# Altium PCB Spartan3_TestBoard.PcbDoc
Units mil, origin at the board's own origin, x right, y up, seen from the top; angles counter-clockwise.
Board outline 1950 x 1950 mil, 2 copper layers (Top Layer, Bottom Layer); 78 components, 51 nets, 480 pads, 69 vias.
Unrouted connection lines stored in the file: 33.
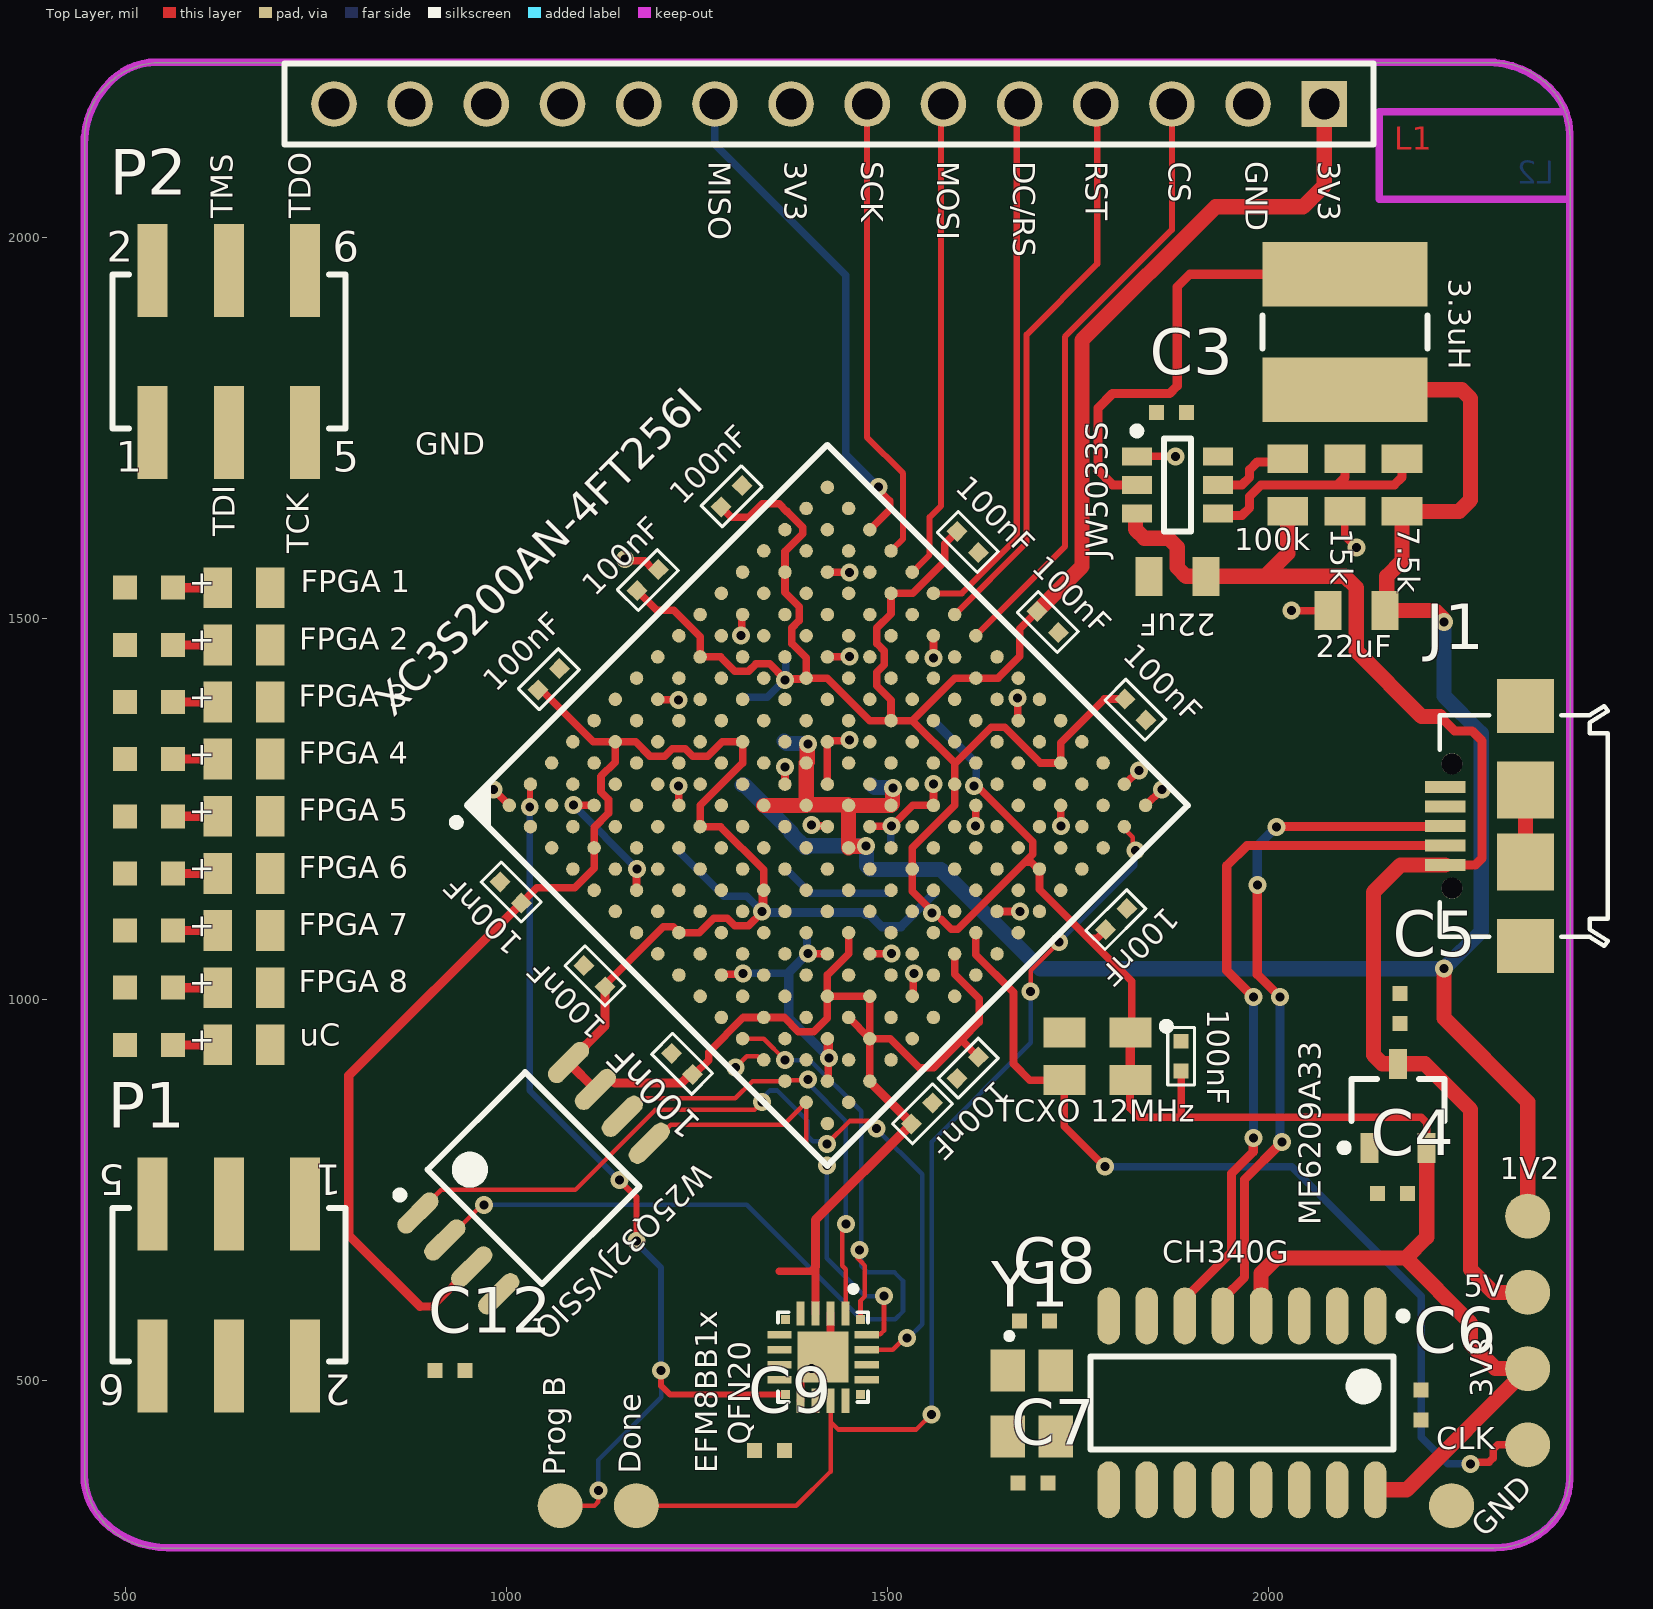
[diagram p0: Top Layer view]
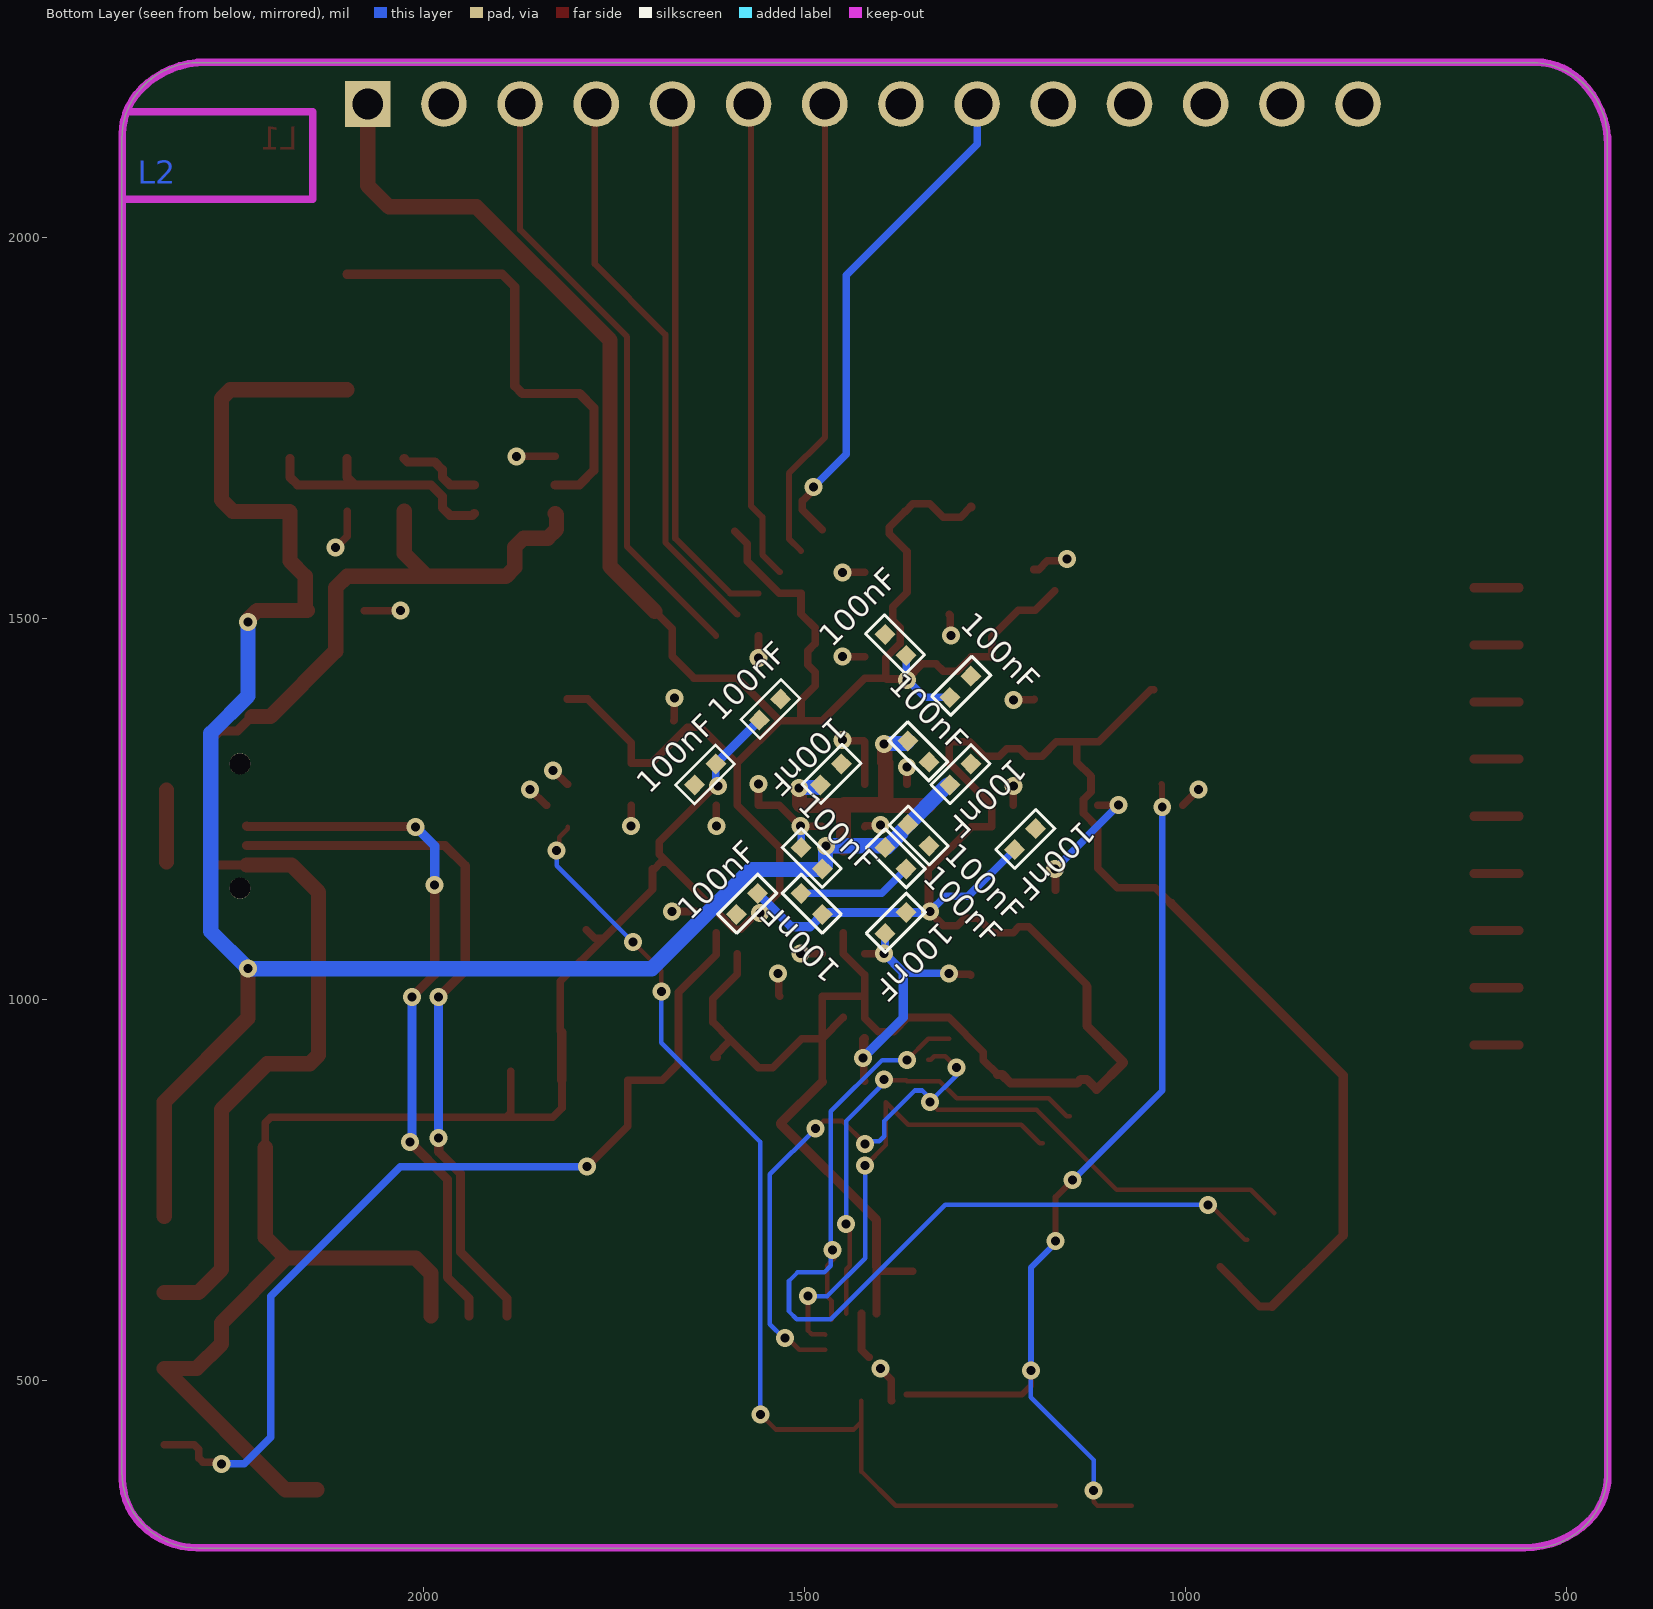
[diagram p1: Bottom Layer view, seen from below]

## Layer stack, top to bottom
Top Solder: solder mask 0.4, Solder Resist, Dk 3.5
Top Layer: signal copper 1.4
Dielectric 1: dielectric 12.6, FR-4, Dk 4.8
Bottom Layer: signal copper 1.4
Bottom Solder: solder mask 0.4, Solder Resist, Dk 3.5

## Board outline
445.71,379.29 ccw(c545.71,379.29) 545.71,279.29 2295.71,279.29 ccw(c2295.71,379.29) 2395.71,379.29 2395.71,2129.29 ccw(c2295.71,2129.29) 2295.71,2229.29 545.71,2229.29 ccw(c545.71,2129.29) 445.71,2129.29

## Design rules (kind name [scope] priority, off if disabled: settings)
Clearance [All] p1: gap=5 ignorepadtopadclearanceinfootprint=FALSE
PolygonConnect [All] p1: connectstyle=Relief reliefconductorwidth=10 reliefentries=4 polygonreliefangle="90 Angle" airgapwidth=10
RoutingVias [All] p1: holewidth=11.81 width=23.62 viastyle="Through Hole" minholewidth=11.81 minwidth=23.62 maxholewidth=11.81 maxwidth=23.62
SolderMaskExpansion [All] p1: expansion=4 istentingtop=FALSE
Width [All] p1: maxlimit=25 minlimit=5 preferedwidth=5 minimp=50.000000 maximp=50.000000 favimp=50.000000
30 further rules are at their usual default settings.

## Classes and differential pairs
component class Spartan3_TestBoard_3: CS
component class Spartan3_TestBoard_2: "TCXO 12MHz"

## Components (designator, comment, footprint, x,y, rotation, side; value= is the part's Value field where it differs from the comment)
1V2 "1V2" Testpoint 2340,715 r0 top (schematic designator T1)
3.3uH "3.3uH, 2A" WE-PD2_5848 2100,1875.79 r270 top (schematic designator L1)
3V3 "3V3" Testpoint 2340,515 r0 top (schematic designator T2)
5V "5V" Testpoint 2340,615 r0 top (schematic designator T3)
7.5k "7.5kΩ" WRIS-PSMB_0805_H=0.35mm 2175,1675 r270 top (schematic designator R3)
15k "15kΩ" WRIS-PSMB_0805_H=0.35mm 2100,1675 r90 top (schematic designator R2)
22uF "22uF" WCAP-CSGP_0805_H=0.8mm_Reflow 2115,1510 r0 top (schematic designator C2)
22uF "22uF" WCAP-CSGP_0805_H=0.8mm_Reflow 1880,1555 r0 top (schematic designator C1)
100k "100kΩ" WRIS-PSMB_0805_H=0.35mm 2025,1675 r90 top (schematic designator R1)
100nF "100nF" WCAP-CSGP_0402 1380,1100 r135 bottom (schematic designator C40)
100nF "100nF" WCAP-CSGP_0402 1490,1125 r225 bottom (schematic designator C39)
100nF "100nF" WCAP-CSGP_0402 1115,1030 r315 top (schematic designator C38)
100nF "100nF" WCAP-CSGP_0402 1545,850 r225 top (schematic designator C37)
100nF "100nF" WCAP-CSGP_0402 1575,1125 r135 bottom (schematic designator C35)
100nF "100nF" WCAP-CSGP_0402 1630,1295 r135 bottom (schematic designator C34)
100nF "100nF" WCAP-CSGP_0402 1055,1420 r225 top (schematic designator C33)
100nF "100nF" WCAP-CSGP_0402 1545,1380 r315 bottom (schematic designator C32)
100nF "100nF" WCAP-CSGP_0402 1605,1600 r135 top (schematic designator C31)
100nF "100nF" WCAP-CSGP_0402 1295,1410 r315 bottom (schematic designator C30)
100nF "100nF" WCAP-CSGP_0402 1710,1495 r135 top (schematic designator C29)
100nF "100nF" WCAP-CSGP_0402 1380,1465 r225 bottom (schematic designator C28)
100nF "100nF" WCAP-CSGP_0402 1185,1550 r225 top (schematic designator C27)
100nF "100nF" WCAP-CSGP_0402 1230,915 r315 top (schematic designator C26)
100nF "100nF" WCAP-CSGP_0402 1295,1660 r225 top (schematic designator C25)
100nF "100nF" WCAP-CSGP_0402 1885,925 r90 top (schematic designator C23)
100nF "100nF" WCAP-CSGP_0402 1800,1105 r225 top (schematic designator C22)
100nF "100nF" WCAP-CSGP_0402 1825,1380 r135 top (schematic designator C21)
100nF "100nF" WCAP-CSGP_0402 1005,1140 r315 top (schematic designator C20)
100nF "100nF" WCAP-CSGP_0402 1210,1210 r315 bottom (schematic designator C19)
100nF "100nF" WCAP-CSGP_0402 1490,1185 r45 bottom (schematic designator C18)
100nF "100nF" WCAP-CSGP_0402 1350,1325 r225 bottom (schematic designator C17)
100nF "100nF" WCAP-CSGP_0402 1295,1295 r135 bottom (schematic designator C16)
100nF "100nF" WCAP-CSGP_0402 1350,1215 r225 bottom (schematic designator C15)
100nF "100nF" WCAP-CSGP_0402 1380,1185 r225 bottom (schematic designator C14)
100nF "100nF" WCAP-CSGP_0402 1465,1295 r135 bottom (schematic designator C13)
C3 "100nF" WCAP-CSGP_0402 1872.5,1770 r0 top
C4 "10µF" WCAP-CSGP_0402 2162.5,745 r0 top
C5 "10µF" WCAP-CSGP_0402 2172.5,987.5 r270 top
C6 "100nF" WCAP-CSGP_0402 2200,467.5 r90 top
C7 "22pF" WCAP-CSGP_0402 1690.32,365 r180 top
C8 "22pF" WCAP-CSGP_0402 1692.81,577.5 r0 top
C9 "100nF" WCAP-CSGP_0402 1345,407.5 r0 top
C12 "100nF" WCAP-CSGP_0402 925,512.5 r180 top
C36 "100nF" WCAP-CSGP_0402 1605,910 r45 top
CH340G "CH340G" CH340G 1965,470 r270 top (schematic designator U4)
CLK "SYSCLK" Testpoint 2340,415 r0 top (schematic designator T4)
CS "61301411821" 61301411821 1423,2175 r180 top (schematic designator J2)
D1 "Violet, 3.0V" WL-SMCW_0603_H=0.7mm 530,940 r0 top
D2 "Violet, 3.0V" WL-SMCW_0603_H=0.7mm 530,1540 r0 top
D3 "Violet, 3.0V" WL-SMCW_0603_H=0.7mm 530,1465 r0 top
D4 "Violet, 3.0V" WL-SMCW_0603_H=0.7mm 530,1390 r0 top
D5 "Violet, 3.0V" WL-SMCW_0603_H=0.7mm 530,1315 r0 top
D6 "Violet, 3.0V" WL-SMCW_0603_H=0.7mm 530,1240 r0 top
D7 "Violet, 3.0V" WL-SMCW_0603_H=0.7mm 530,1165 r0 top
D8 "Violet, 3.0V" WL-SMCW_0603_H=0.7mm 530,1090 r0 top
D9 "Violet, 3.0V" WL-SMCW_0603_H=0.7mm 530,1015 r0 top
Done "FPGA Done" Testpoint 1170,335 r0 top (schematic designator T6)
EFM8BB1x "EFM8BB1x-QFN20" *QFN50P300X300X80-21N 1415,530 r270 top (schematic designator U*)
"FPGA 1" "50Ω" WRIS-PSMB_0805_H=0.35mm 655,1540 r180 top (schematic designator R5)
"FPGA 2" "50Ω" WRIS-PSMB_0805_H=0.35mm 655,1465 r180 top (schematic designator R6)
"FPGA 3" "50Ω" WRIS-PSMB_0805_H=0.35mm 655,1390 r180 top (schematic designator R7)
"FPGA 4" "50Ω" WRIS-PSMB_0805_H=0.35mm 655,1315 r180 top (schematic designator R8)
"FPGA 5" "50Ω" WRIS-PSMB_0805_H=0.35mm 655,1240 r180 top (schematic designator R9)
"FPGA 6" "50Ω" WRIS-PSMB_0805_H=0.35mm 655,1165 r180 top (schematic designator R10)
"FPGA 7" "50Ω" WRIS-PSMB_0805_H=0.35mm 655,1090 r180 top (schematic designator R11)
"FPGA 8" "50Ω" WRIS-PSMB_0805_H=0.35mm 655,1015 r180 top (schematic designator R12)
GND "GND" Testpoint 2240,335 r0 top (schematic designator T5)
J1 "Micro USB 2.0 Type B Receptacle" 629105136821 2337,1227.24 r90 top
JW5033S "JW5033S" SOT95P280X110-6N 1880,1675 r0 top (schematic designator U1)
ME6209A33 "ME6209" SOT95P285X150-3N 2170,860 r90 top (schematic designator U2)
P1 "61000621121" 61000621121 635,625 r180 top
P2 "61000621121" 61000621121 635,1850 r0 top
"Prog B" "FPGA Prog B" Testpoint 1070,335 r0 top (schematic designator T7)
"TCXO 12MHz" "12MHz, +/-50ppm, 3.3V" WE-SPXO_CFPS-39 1775,925 r180 top (schematic designator TCXO)
uC "50Ω" WRIS-PSMB_0805_H=0.35mm 655,940 r180 top (schematic designator R4)
W25Q32JVSSIQ "W25Q32JVSSIQ" W25Q32JVSSIQ 1035,765 r45 top (schematic designator U3)
XC3S200AN-4FT256I "XC3S200AN-4FT256I" XC3S200AN-4FT256I 1420.71,1254.29 r45 top (schematic designator U6)
Y1 "12MHz" WE-XTAL_CFPX-180 1689,469.19 r270 top

## Footprints (in the part's own frame and the unit in brackets; to place one, negate y for a bottom-side part, rotate by r counter-clockwise, add the part's x,y. Pads: shape width x height; smd on the part's side, far side on the other; paste and mask are expansions set on the pad)
61000621121 [mm] "Pin Header, pitch 2.54 mm, SMD, Vertical, dual row, 6p"
  rect 1x3.1 smd: 1(-2.54,-2.7) 2(-2.54,2.7) 3(0,-2.7) 4(0,2.7) 5(2.54,-2.7) 6(2.54,2.7)
  silkscreen extent -3.89,-2.56 3.89,2.57, body extent -3.81,-3.75 3.81,3.75, height 9.62
61301411821 [mm] "Socket Header, Pitch 2.54 mm, THT, Vertical, single row, 14p"
  rect 1.52x1.52 hole 1.02: 1(-16.51,0)
  round 1.52 hole 1.02: 2(-13.97,0) 3(-11.43,0) 4(-8.89,0) 5(-6.35,0) 6(-3.81,0) 7(-1.27,0) 8(1.27,0) 9(3.81,0) 10(6.35,0) 11(8.89,0) 12(11.43,0) 13(13.97,0) 14(16.51,0)
  silkscreen extent -18.16,-1.35 18.16,1.35, body extent -18.03,-1.25 18.03,1.25, height 8.55
629105136821 [mm] "Micro USB 2.0 SMT Type B Horizontal 5 Contacts"
  rect 0.4x1.35 smd: 1(-1.3,2.675) 2(-0.65,2.675) 3(0,2.675) 4(0.65,2.675) 5(1.3,2.675)
  round 0.7 hole 0.7 unplated: MH1(-2.075,2.45) MH2(2.075,2.45)
  rect 1.8x1.9 smd: Shell(-4,0) Shell(4,0)
  rect 1.9x1.9 smd: Shell(-1.2,0) Shell(1.2,0)
  silkscreen extent -4,-2.75 4,2.85, body extent -4,-2.73 4,3.17, height 2.69
*QFN50P300X300X80-21N [mm]
  rect 0.3x0.3 smd: 1(-1.25,1.25) 6(-1.25,-1.25) 11(1.25,-1.25) 16(1.25,1.25)
  rect 0.81x0.26 smd: 2(-1.455,0.75) 3(-1.455,0.25) 4(-1.455,-0.25) 5(-1.455,-0.75) 12(1.455,-0.75) 13(1.455,-0.25) 14(1.455,0.25) 15(1.455,0.75)
  rect 0.26x0.81 smd: 7(-0.75,-1.455) 8(-0.25,-1.455) 9(0.25,-1.455) 10(0.75,-1.455) 17(0.75,1.455) 18(0.25,1.455) 19(-0.25,1.455) 20(-0.75,1.455)
  rect 1.7x1.7 smd: 21(0,0)
  silkscreen extent -2.37,-1.5 1.5,1.5, body extent -1.52,-1.52 1.52,1.52, height 0.7
CH340G [mm] "TSOP, 16-Leads, Body 10,06x3,90mm, Pitch 1,27mm, IPC Medium Density"
  oval 1.9x0.75 smd: 1(-2.9,4.445) 2(-2.9,3.175) 3(-2.9,1.905) 4(-2.9,0.635) 5(-2.9,-0.635) 6(-2.9,-1.905) 7(-2.9,-3.175) 8(-2.9,-4.445) 9(2.9,-4.445) 10(2.9,-3.175) 11(2.9,-1.905) 12(2.9,-0.635) 13(2.9,0.635) 14(2.9,1.905) 15(2.9,3.175) 16(2.9,4.445)
  silkscreen extent -3.02,-5.05 1.55,5.5, body extent -3.41,-5.05 3.41,5.05, height 1.6
SOT95P280X110-6N [mm] "SOT23, 6-Leads, Body 2,90x2,80mm, Pitch 0,95mm, IPC Medium Density"
  rect 1x0.6 smd: 1(-1.35,0.95) 2(-1.35,0) 3(-1.35,-0.95) 4(1.35,-0.95) 5(1.35,0) 6(1.35,0.95)
  silkscreen extent -1.47,-1.55 0.45,1.92, body extent -1.5,-1.55 1.5,1.55, height 1.1
SOT95P285X150-3N [mm] "SOT23, 3-Leads, Body 2,95x2,85mm, Pitch 0,95mm, IPC Medium Density"
  rect 1x0.6 smd: 1(-1.4,0.95) 2(-1.4,-0.95) 3(1.4,0)
  silkscreen extent -1.52,-1.55 0.9,1.92, body extent -1.55,-1.55 1.55,1.55, height 1.5
Testpoint [mm]
  round 1.5 / inner round 1.5 / far side round 0 all layers, no hole: 1(0,0)
W25Q32JVSSIQ [mm] "IC FLASH 32MBIT SPI/QUAD 8SOIC"
  oval 1.7x0.6 smd: 1(-3.55,1.905) 2(-3.55,0.635) 3(-3.55,-0.635) 4(-3.55,-1.905) 5(3.55,-1.905) 6(3.55,-0.635) 7(3.55,0.635) 8(3.55,1.905)
  silkscreen extent -3.67,-2.7 2.3,2.88, body extent -3.95,-2.7 3.95,2.7, height 2.16
WCAP-CSGP_0402 [mm] "Ceramic Capacitors, body 1x0.5mm"
  rect 0.5x0.5 smd: 1(-0.5,0) 2(0.5,0)
  body extent -0.5,-0.25 0.5,0.25, height 0.5
WCAP-CSGP_0805_H=0.8mm_Reflow [mm] "Ceramic Capacitors, body 2x1.25mm"
  rect 0.9x1.3 smd: 1(-0.95,0) 2(0.95,0)
  body extent -1,-0.62 1,0.63, height 0.8
WE-PD2_5848 [mm] "SMD Power Inductor, 2-Leads, body 5.8x5.2mm"
  rect 2.15x5.5 smd: 1(-1.925,0) 2(1.925,0)
  silkscreen extent -0.55,-2.75 0.55,2.75, body extent -2.9,-2.6 2.89,2.6, height 4.48
WE-SPXO_CFPS-39 [mm] "Simple Packaged Quartz Oscillator, body 3.2x2.5mm"
  rect 1.4x1 smd: 1(-1.1,-0.8) 2(1.1,-0.8) 3(1.1,0.8) 4(-1.1,0.8)
  silkscreen extent -2.43,-1.12 -2.18,-0.88, body extent -1.6,-1.25 1.6,1.25, height 1.05
WE-XTAL_CFPX-180 [mm] "Quartz Crystal, size CFPX-180, body 3.4x2.7mm"
  rect 1.4x1.15 smd: 1(-1.1,-0.8) 2(1.1,-0.8) 3(1.1,0.8) 4(-1.1,0.8)
  silkscreen extent -2.35,-0.85 -2.15,-0.65, body extent -1.7,-1.35 1.7,1.35, height 0.65
WL-SMCW_0603_H=0.7mm [mm] "SMD Mono-color Chip LED, body 1.6x0.8mm"
  rect 0.8x0.8 smd: 1(-0.8,0) 2(0.8,0)
  body extent -0.8,-0.4 0.8,0.4, height 0.7
WRIS-PSMB_0805_H=0.35mm [mm] "Metal Plate Resistor, SMT, body size 2x1.25mm"
  rect 0.95x1.36 smd: 1(-0.875,0) 2(0.875,0)
  body extent -1,-0.62 1,0.63, height 0.35
XC3S200AN-4FT256I [mm] "BGA, 256-Leads, Body 17,00x17,00mmx1,55mm, Pitch 1,00mm"
  round 0.45 smd: A1(-7.5,7.5) A2(-6.5,7.5) A3(-5.5,7.5) A4(-4.5,7.5) A5(-3.5,7.5) A6(-2.5,7.5) A7(-1.5,7.5) A8(-0.5,7.5) A9(0.5,7.5) A10(1.5,7.5) A11(2.5,7.5) A12(3.5,7.5) A13(4.5,7.5) A14(5.5,7.5) A15(6.5,7.5) A16(7.5,7.5) B1(-7.5,6.5) B2(-6.5,6.5) B3(-5.5,6.5) B4(-4.5,6.5) B5(-3.5,6.5) B6(-2.5,6.5) B7(-1.5,6.5) B8(-0.5,6.5) B9(0.5,6.5) B10(1.5,6.5) B11(2.5,6.5) B12(3.5,6.5) B13(4.5,6.5) B14(5.5,6.5) B15(6.5,6.5) B16(7.5,6.5) C1(-7.5,5.5) C2(-6.5,5.5) C3(-5.5,5.5) C4(-4.5,5.5) C5(-3.5,5.5) C6(-2.5,5.5) C7(-1.5,5.5) C8(-0.5,5.5) C9(0.5,5.5) C10(1.5,5.5) C11(2.5,5.5) C12(3.5,5.5) C13(4.5,5.5) C14(5.5,5.5) C15(6.5,5.5) C16(7.5,5.5) D1(-7.5,4.5) D2(-6.5,4.5) D3(-5.5,4.5) D4(-4.5,4.5) D5(-3.5,4.5) D6(-2.5,4.5) D7(-1.5,4.5) D8(-0.5,4.5) D9(0.5,4.5) D10(1.5,4.5) D11(2.5,4.5) D12(3.5,4.5) D13(4.5,4.5) D14(5.5,4.5) D15(6.5,4.5) D16(7.5,4.5) E1(-7.5,3.5) E2(-6.5,3.5) E3(-5.5,3.5) E4(-4.5,3.5) E5(-3.5,3.5) E6(-2.5,3.5) E7(-1.5,3.5) E8(-0.5,3.5) E9(0.5,3.5) E10(1.5,3.5) E11(2.5,3.5) E12(3.5,3.5) E13(4.5,3.5) E14(5.5,3.5) E15(6.5,3.5) E16(7.5,3.5) F1(-7.5,2.5) F2(-6.5,2.5) F3(-5.5,2.5) F4(-4.5,2.5) F5(-3.5,2.5) F6(-2.5,2.5) F7(-1.5,2.5) F8(-0.5,2.5) F9(0.5,2.5) F10(1.5,2.5) F11(2.5,2.5) F12(3.5,2.5) F13(4.5,2.5) F14(5.5,2.5) F15(6.5,2.5) F16(7.5,2.5) G1(-7.5,1.5) G2(-6.5,1.5) G3(-5.5,1.5) G4(-4.5,1.5) G5(-3.5,1.5) G6(-2.5,1.5) G7(-1.5,1.5) G8(-0.5,1.5) G9(0.5,1.5) G10(1.5,1.5) G11(2.5,1.5) G12(3.5,1.5) G13(4.5,1.5) G14(5.5,1.5) G15(6.5,1.5) G16(7.5,1.5) H1(-7.5,0.5) H2(-6.5,0.5) H3(-5.5,0.5) H4(-4.5,0.5) H5(-3.5,0.5) H6(-2.5,0.5) H7(-1.5,0.5) H8(-0.5,0.5) H9(0.5,0.5) H10(1.5,0.5) H11(2.5,0.5) H12(3.5,0.5) H13(4.5,0.5) H14(5.5,0.5) H15(6.5,0.5) H16(7.5,0.5) J1(-7.5,-0.5) J2(-6.5,-0.5) J3(-5.5,-0.5) J4(-4.5,-0.5) J5(-3.5,-0.5) J6(-2.5,-0.5) J7(-1.5,-0.5) J8(-0.5,-0.5) J9(0.5,-0.5) J10(1.5,-0.5) J11(2.5,-0.5) J12(3.5,-0.5) J13(4.5,-0.5) J14(5.5,-0.5) J15(6.5,-0.5) J16(7.5,-0.5) K1(-7.5,-1.5) K2(-6.5,-1.5) K3(-5.5,-1.5) K4(-4.5,-1.5) K5(-3.5,-1.5) K6(-2.5,-1.5) K7(-1.5,-1.5) K8(-0.5,-1.5) K9(0.5,-1.5) K10(1.5,-1.5) K11(2.5,-1.5) K12(3.5,-1.5) K13(4.5,-1.5) K14(5.5,-1.5) K15(6.5,-1.5) K16(7.5,-1.5) L1(-7.5,-2.5) L2(-6.5,-2.5) L3(-5.5,-2.5) L4(-4.5,-2.5) L5(-3.5,-2.5) L6(-2.5,-2.5) L7(-1.5,-2.5) L8(-0.5,-2.5) L9(0.5,-2.5) L10(1.5,-2.5) L11(2.5,-2.5) L12(3.5,-2.5) L13(4.5,-2.5) L14(5.5,-2.5) L15(6.5,-2.5) L16(7.5,-2.5) M1(-7.5,-3.5) M2(-6.5,-3.5) M3(-5.5,-3.5) M4(-4.5,-3.5) M5(-3.5,-3.5) M6(-2.5,-3.5) M7(-1.5,-3.5) M8(-0.5,-3.5) M9(0.5,-3.5) M10(1.5,-3.5) M11(2.5,-3.5) M12(3.5,-3.5) M13(4.5,-3.5) M14(5.5,-3.5) M15(6.5,-3.5) M16(7.5,-3.5) N1(-7.5,-4.5) N2(-6.5,-4.5) N3(-5.5,-4.5) N4(-4.5,-4.5) N5(-3.5,-4.5) N6(-2.5,-4.5) N7(-1.5,-4.5) N8(-0.5,-4.5) N9(0.5,-4.5) N10(1.5,-4.5) N11(2.5,-4.5) N12(3.5,-4.5) N13(4.5,-4.5) N14(5.5,-4.5) N15(6.5,-4.5) N16(7.5,-4.5) P1(-7.5,-5.5) P2(-6.5,-5.5) P3(-5.5,-5.5) P4(-4.5,-5.5) P5(-3.5,-5.5) P6(-2.5,-5.5) P7(-1.5,-5.5) P8(-0.5,-5.5) P9(0.5,-5.5) P10(1.5,-5.5) P11(2.5,-5.5) P12(3.5,-5.5) P13(4.5,-5.5) P14(5.5,-5.5) P15(6.5,-5.5) P16(7.5,-5.5) R1(-7.5,-6.5) R2(-6.5,-6.5) R3(-5.5,-6.5) R4(-4.5,-6.5) R5(-3.5,-6.5) R6(-2.5,-6.5) R7(-1.5,-6.5) R8(-0.5,-6.5) R9(0.5,-6.5) R10(1.5,-6.5) R11(2.5,-6.5) R12(3.5,-6.5) R13(4.5,-6.5) R14(5.5,-6.5) R15(6.5,-6.5) R16(7.5,-6.5) T1(-7.5,-7.5) T2(-6.5,-7.5) T3(-5.5,-7.5) T4(-4.5,-7.5) T5(-3.5,-7.5) T6(-2.5,-7.5) T7(-1.5,-7.5) T8(-0.5,-7.5) T9(0.5,-7.5) T10(1.5,-7.5) T11(2.5,-7.5) T12(3.5,-7.5) T13(4.5,-7.5) T14(5.5,-7.5) T15(6.5,-7.5) T16(7.5,-7.5)
  silkscreen extent -9.27,-8.5 8.5,8.5, body extent -8.5,-8.5 8.5,8.5, height 1.55

## Part data
1V2 3V3 5V CLK Done GND "Prog B": library part Testpoint
3.3uH: library part 744774033, "WE-PD2 SMT Power Inductor, size 5848, 3.3uH, 4A", DC Resistance max.=0.06Ohm, DC Resistance typ.=0.042Ohm, Inductance=3.3uH, Manufacturer="Wurth Elektronik", Operating Temperature="-40 to +125degC", Rated Current=4A, Saturation Current=7.5A, Self Resonant Frequency=43MHz, ComponentLink1Description=Manufacturer, ComponentLink1URL=http://www.we-online.de, ComponentLink2Description=Datasheet, ComponentLink2URL=https://www.we-online.com/catalog/datasheet/744774033.pdf, Manufacturer Part Number=744774033, Mounting Technology=SMT, Packaging="Tape and Reel", Published Date="April 2020", Size=5848
7.5k 15k 100k "FPGA 1" "FPGA 2" "FPGA 3" "FPGA 4" "FPGA 5" "FPGA 6" "FPGA 7" "FPGA 8" uC: library part 580060720003, "WRIS-PSMB Metal Plate Resistors, size 0805, 5mOhm, +/-1%, 0.5W", Operating Temperature="-55 to +155degC", Rated Current=10A, Rated Power=0.5W, Resistance=5mOhm, Resistance Tolerance=+/-1%, Temperature Coefficient of Resistance=+/-100ppm/degC, ComponentLink1Description=Manufacturer, ComponentLink1URL=http://www.we-online.de, ComponentLink2Description=Datasheet, ComponentLink2URL=https://katalog.we-online.com/pbs/datasheet/580060720003.pdf, Height=0.35mm, Length=2mm, Mounting Technology=SMT, Packaging="Tape and Reel", Part Number=580060720003, Published Date="September 2019", Publisher="Wurth Elektronik", Size=0805, Technical Reference=MB0805R005F102KAATP0000, Width=1.25mm
22uF 22uF: library part 885012007022, "WCAP-CSGP General Purpose Ceramic Capacitors, size 0805, 1.5nF, +/-5%, 16VDC", Capacitance=1.5nF, Capacitance Tolerance=+/-5%, Isolation Resistance=>=10GOhm, Operating Temperature="-55 to +125degC", Rated Voltage=16VDC, Ceramic Type=NP0, ComponentLink1Description=Manufacturer, ComponentLink1URL=http://www.we-online.de, ComponentLink2Description=Datasheet, ComponentLink2URL=https://katalog.we-online.com/pbs/datasheet/885012007022.pdf, Dissipation Factor=Q>=1000, Height="0.8mm +/-0.10mm", Mounting Technology=SMD, Packaging="Tape and Reel", Part Number=885012007022, Published Date="August 2019", Publisher="Wurth Elektronik", Size=0805, Technical Reference=NP00805152J016DFCT10000
100nF 100nF 100nF 100nF 100nF 100nF 100nF 100nF 100nF 100nF 100nF 100nF 100nF 100nF 100nF 100nF 100nF 100nF 100nF 100nF 100nF 100nF 100nF 100nF 100nF 100nF C3 C6 C9 C12 C36: library part 885012205018, "WCAP-CSGP General Purpose Ceramic Capacitors, size 0402, 100nF, +/-10%, 10VDC", Capacitance Tolerance=+/-10%, Isolation Resistance=>=5GOhm, Operating Temperature="-55 to +125degC", Rated Voltage=10VDC, Capacitance=100nF, Ceramic Type=X7R, ComponentLink1Description=Manufacturer, ComponentLink1URL=http://www.we-online.de, ComponentLink2Description=Datasheet, ComponentLink2URL=https://katalog.we-online.com/pbs/datasheet/885012205018.pdf, Dissipation Factor=#NAME?, Height="0.5mm +/-0.05mm", Mounting Technology=SMD, Packaging="Tape and Reel", Part Number=885012205018, Published Date="August 2019", Publisher="Wurth Elektronik", Size=0402, Technical Reference=X7R0402104K010DFCT10000
C4 C5 C7 C8: library part 885012205018, "WCAP-CSGP General Purpose Ceramic Capacitors, size 0402, 100nF, +/-10%, 10VDC", Capacitance=100nF, Capacitance Tolerance=+/-10%, Isolation Resistance=>=5GOhm, Operating Temperature="-55 to +125degC", Rated Voltage=10VDC, Ceramic Type=X7R, ComponentLink1Description=Manufacturer, ComponentLink1URL=http://www.we-online.de, ComponentLink2Description=Datasheet, ComponentLink2URL=https://katalog.we-online.com/pbs/datasheet/885012205018.pdf, Dissipation Factor=#NAME?, Height="0.5mm +/-0.05mm", Mounting Technology=SMD, Packaging="Tape and Reel", Part Number=885012205018, Published Date="August 2019", Publisher="Wurth Elektronik", Size=0402, Technical Reference=X7R0402104K010DFCT10000
CS: "WR-PHD Socket Header, THT, pitch 2.54mm, Single Row, Vertical, 14p", Contact Resistance=20mOhm, Manufacturer="Wurth Elektronik", Operating Temperature="-40 to +125degC", Rated Current=3A, Withstanding Voltage=500VAC, Working Voltage=250VAC, ComponentLink1Description=Manufacturer, ComponentLink1URL=http://www.we-online.de, ComponentLink2Description=Datasheet, ComponentLink2URL=https://www.we-online.com/catalog/datasheet/61301411821.pdf, Gender="Socket Header", Manufacturer Part Number=61301411821, Mounting Technology=THT, Orientation=Vertical, Packaging=Tray, Pin Number=14, Pitch=2.54mm, Published Date="May 2020", Row Number=Single
D1 D2 D3 D4 D5 D6 D7 D8 D9: library part 150060GS75000, "WL-SMCW SMT Mono-color Chip LED Waterclear, size 0603, Green, 3.2V, 140deg", Emitting Color=Green, Forward Voltage typ.=3.2V, Operating Temperature="-40 to +85degC", Chip Technology=InGaN, ComponentLink1Description=Manufacturer, ComponentLink1URL=http://www.we-online.de, ComponentLink2Description=Datasheet, ComponentLink2URL=https://www.we-online.com/catalog/datasheet/150060GS75000.pdf, Dominant Wavelength typ.=525nm, Luminous Intensity typ.=430mcd, Mounting Technology=SMT, Packaging="Tape and Reel", Part Number=150060GS75000, Peak Wavelength typ.=515nm, Published Date="December 2019", Publisher="Wurth Elektronik", Size=0603, Viewing Angle=140deg
J1: library part 629105136821, "Micro USB 2.0 Type B, Receptacle, Horizontal, SMT", Manufacturer="Wurth Elektronik", Operating Temperature="-40 to +105degC", Rated Current=1A, Working Voltage=30VAC, Application="Micro USB 2.0", ComponentLink1Description=Manufacturer, ComponentLink1URL=http://www.we-online.de, ComponentLink2Description=Datasheet, ComponentLink2URL=https://katalog.we-online.com/em/datasheet/629105136821.pdf, Gender=Receptacle, Interface Type="Type B", Manufacturer Part Number=629105136821, Mounting Technology=SMT, Packaging="Tape and Reel", Pin Number=5, Published Date="August 2020", Type=Horizontal
JW5033S: "2A Step-Down Converter"
P1 P2: "WR-PHD Pin Header, SMT, pitch 2.54mm, Dual Row, Vertical, 6p", Contact Resistance=20mOhm, Manufacturer="Wurth Elektronik", Operating Temperature="-40 to +125degC", Rated Current=3A, Withstanding Voltage=500VAC, Working Voltage=250VAC, ComponentLink1Description=Manufacturer, ComponentLink1URL=http://www.we-online.de, ComponentLink2Description=Datasheet, ComponentLink2URL=https://www.we-online.com/catalog/datasheet/61000621121.pdf, Gender="Pin Header", Manufacturer Part Number=61000621121, Mounting Technology=SMT, Orientation=Vertical, Packaging=Tube, Pin Number=6, Pitch=2.54mm, Published Date="May 2020", Row Number=Dual
"TCXO 12MHz": library part 831025492, "WE-SPXO Simple Packaged Quartz Oscillator, size CFPS-39, 12MHz, +/-50ppm, 3.3V", Frequency=12MHz, Frequency Stability=50ppm, Operating Temperature="-40 up to +85degC", Supply Voltage=3.3V, ComponentLink1Description=Manufacturer, ComponentLink1URL=http://www.we-online.de, ComponentLink2Description=Datasheet, ComponentLink2URL=https://katalog.we-online.com/pbs/datasheet/831025492.pdf, Mounting Technology=SMT, Packaging="Tape and Reel", Part Number=831025492, Published Date="March 2019", Publisher="Wurth Elektronik", Size=CFPS-39
W25Q32JVSSIQ: "IC FLASH 32MBIT SPI/QUAD 8SOIC"
XC3S200AN-4FT256I: "Spartan-3AN Non-Volatile FPGA, 195 User I/Os, 256-Pin FTBGA, Standard Performance, Industrial Grade", Code_JEDEC=MS-034-AAF-1*, DatasheetVersion="ver 3.2, Nov-2009", PackageDescription="256-Ball Fine Pitch Thin Ball Grid Array 1.00 mm Pitch (FT256)", PackageReference=FT256, PackageVersion="ver1.3, Oct-2007", PartNumber=XC3S200AN-4FT256I
Y1: library part 830055295, "WE-XTAL Quartz Crystal, SMT, CFPX-180, 12MHz, +/-20ppm", Frequency Stability=+/-30ppm, Frequency Tolerance=+/-20ppm, Load Capacitance=18pF, Manufacturer="Wurth Elektronik", Operating Temperature="-40 to +85degC", ComponentLink1Description=Manufacturer, ComponentLink1URL=http://www.we-online.de, ComponentLink2Description=Datasheet, ComponentLink2URL=https://katalog.we-online.com/pbs/datasheet/830055295.pdf, Frequency=12MHz, Manufacturer Part Number=830055295, Mounting Technology=SMT, Packaging="Tape and Reel", Published Date="July 2020", Size=CFPX-180

## Via types
v1: diameter 23.62, hole 11.81, Top Layer to Bottom Layer, tented both sides, 69 vias

## Nets (pads, with @x,y where several pads share a name; then routed paths per layer and width w, separated by ;. In a path a pad name is that pad's centre, name@x,y a point inside that pad or via, vN(x,y) a via of type N, cw(c..) or ccw(c..) an arc to the next point about the centre after c; other vN are vias at no path point)
1V2: 1V2.1 3.3uH.2 7.5k.2 22uF.2@2152.4,1510 100nF.1@1308.92,1281.08 100nF.1@1363.92,1228.92 100nF.1@1363.92,1338.92 100nF.1@1393.92,1198.92 100nF.1@1476.08,1171.08 100nF.1@1478.92,1281.08 XC3S200AN-4FT256I.G7 XC3S200AN-4FT256I.G9 XC3S200AN-4FT256I.H8 XC3S200AN-4FT256I.J9 XC3S200AN-4FT256I.K8 XC3S200AN-4FT256I.K10 | length 2943.1
  Top Layer w20: XC3S200AN-4FT256I.G7 XC3S200AN-4FT256I.H8 ; v1(1395,1335) 1394.31,1334.31 1394.31,1311.4 XC3S200AN-4FT256I.G9 1392.87,1282.62 1392.87,1255.28 1447.56,1255.28 XC3S200AN-4FT256I.J9 ; v1(1471.29,1201.29) 1470.6,1200.6 1450.54,1200.6 XC3S200AN-4FT256I.K8 XC3S200AN-4FT256I.J9 ; v1(1506.93,1276.93) 1506.24,1276.24 1506.24,1256.3 XC3S200AN-4FT256I.K10 XC3S200AN-4FT256I.J9 ; 3.3uH.2 2253.28,1800 2265,1788.28 2265,1655 2250,1640 2175.55,1640 2175,1639.45 2175,1575 2155,1555 2155,1512.6 2152.4,1510 2218.28,1510 2230,1498.28 v1(2230,1495) ; v1(2230,1040) 2230,975 2340,865 1V2.1
  Bottom Layer w20: 100nF.1@1308.92,1281.08 1311.75,1281.08 1373.3,1219.54 1373.3,1217.36 1391.74,1198.92 1393.92,1198.92 1396.29,1201.29 v1(1471.29,1201.29) 1471.98,1200.6 1471.98,1175.18 1476.08,1171.08 1477.17,1170 1570,1170 1700,1040 v1(2230,1040) 2279,1089 2279,1349 2230,1398 v1(2230,1495) ; 100nF.1@1363.92,1338.92 1367.14,1335.69 1394.31,1335.69 v1(1395,1335) ; 100nF.1@1478.92,1281.08 1482.38,1277.62 1506.24,1277.62 v1(1506.93,1276.93)
3V3: 3V3.1 100nF.1@1885,905.32 100nF.2@1018.92,1126.08 100nF.2@1041.08,1406.08 100nF.2@1128.92,1016.08 100nF.2@1171.08,1536.08 100nF.2@1223.92,1196.08 100nF.2@1243.92,901.08 100nF.2@1281.08,1646.08 100nF.2@1308.92,1396.08 100nF.2@1366.08,1113.92 100nF.2@1366.08,1451.08 100nF.2@1476.08,1111.08 100nF.2@1531.08,836.08 100nF.2@1558.92,1366.08 100nF.2@1561.08,1138.92 100nF.2@1591.08,1613.92 100nF.2@1616.08,1308.92 100nF.2@1696.08,1508.92 100nF.2@1786.08,1091.08 100nF.2@1811.08,1393.92 "TCXO 12MHz.1" "TCXO 12MHz.4" C4.2 C6.2 C9.1 C12.1 C36.2 CH340G.4 CH340G.16 CS.1 CS.8 EFM8BB1x.4 ME6209A33.2 P1.3 P2.1 W25Q32JVSSIQ.3 W25Q32JVSSIQ.7 W25Q32JVSSIQ.8 XC3S200AN-4FT256I.B5 XC3S200AN-4FT256I.B9 XC3S200AN-4FT256I.B13 XC3S200AN-4FT256I.D2 XC3S200AN-4FT256I.E8 XC3S200AN-4FT256I.E11 XC3S200AN-4FT256I.E15 XC3S200AN-4FT256I.F5 XC3S200AN-4FT256I.H2 XC3S200AN-4FT256I.H12 XC3S200AN-4FT256I.J5 XC3S200AN-4FT256I.J15 XC3S200AN-4FT256I.L12 XC3S200AN-4FT256I.M2 XC3S200AN-4FT256I.M6 XC3S200AN-4FT256I.M9 XC3S200AN-4FT256I.N4 XC3S200AN-4FT256I.N15 XC3S200AN-4FT256I.P4 XC3S200AN-4FT256I.P5 XC3S200AN-4FT256I.R4 XC3S200AN-4FT256I.R8 XC3S200AN-4FT256I.R12 XC3S200AN-4FT256I.T3 | length 9188.8
  Top Layer w10: 886.05,596.45 901.8,596.45 W25Q32JVSSIQ.3 ; 100nF.2@1018.92,1126.08 1039.08,1146.23 1088.78,1146.23 1114.48,1171.94 XC3S200AN-4FT256I.D2 1114.48,1225.28 1133.34,1244.14 1133.34,1262.1 1123.46,1271.98 1123.46,1292.28 1142.32,1311.14 XC3S200AN-4FT256I.B5 ; 100nF.2@1041.08,1406.08 1045.04,1406.08 1113.31,1337.81 XC3S200AN-4FT256I.B5 ; 100nF.2@1128.92,1016.08 1128.92,1018.92 1205,1095 1218.1,1095 XC3S200AN-4FT256I.H2 1252.51,1087.26 1271.37,1106.11 1289.33,1106.11 1299.21,1096.24 1317.17,1096.24 1335.02,1114.09 v1(1335.02,1115) ; 100nF.2@1171.08,1536.08 1196.58,1510.58 1218.93,1510.58 1253.68,1475.83 XC3S200AN-4FT256I.B9 1280.35,1449.16 1299.21,1430.3 1317.17,1430.3 1327.04,1440.18 1345.01,1440.18 1364.99,1420.19 v1(1364.99,1419.15) 1366.08,1420.24 1391.79,1420.24 XC3S200AN-4FT256I.E11 ; 100nF.2@1246.08,901.08 1265,920 1265,930.38 1310.52,975.9 XC3S200AN-4FT256I.M2 1363.86,975.9 1382.72,957.04 1403.02,957.04 1420.71,974.73 XC3S200AN-4FT256I.N4 ; 100nF.2@1281.08,1646.08 1294.66,1632.5 1317.5,1632.5 1335,1650 1357.5,1650 1367.5,1640 1367.9,1640 1388.36,1619.54 1388.36,1610.86 1365.03,1587.53 XC3S200AN-4FT256I.B13 1365.03,1533.85 1383.89,1514.99 1383.89,1497.03 1374.01,1487.15 1374.01,1466.85 1392.87,1447.99 XC3S200AN-4FT256I.E11 ; XC3S200AN-4FT256I.J5@1336.11,1141.85 XC3S200AN-4FT256I.J5 1337.19,1169.6 1280.35,1226.45 XC3S200AN-4FT256I.F5 1253.68,1254.29 1309.36,1309.97 XC3S200AN-4FT256I.E8 1282.69,1337.81 1263.83,1318.95 1244.11,1318.95 1234.23,1328.83 1216.86,1328.83 1206.98,1318.95 1187.85,1318.95 1168.99,1337.81 XC3S200AN-4FT256I.B5 ; 1357.5,642.6 1399.04,642.6 1405.16,648.72 EFM8BB1x.4 ; XC3S200AN-4FT256I.P4 XC3S200AN-4FT256I.R4 ; XC3S200AN-4FT256I.M6 1448.55,1059.42 1420.71,1031.58 XC3S200AN-4FT256I.N4 ; XC3S200AN-4FT256I.T3@1476.39,891.58 XC3S200AN-4FT256I.T3 XC3S200AN-4FT256I.R4 ; v1(1558.29,1112.87) 1558.29,1115.54 1532.07,1141.76 XC3S200AN-4FT256I.M9 1532.07,1198.61 1587.74,1254.29 XC3S200AN-4FT256I.L12 1587.74,1308.8 ; 1570,1105 1583.36,1091.64 1591.64,1091.64 1679.75,1179.75 ; XC3S200AN-4FT256I.R8 1587.74,1032.75 1620,1000.49 1620,970 1597.5,947.5 ; 100nF.2@1591.08,1613.92 1575,1597.84 1575,1575 1532.68,1532.68 XC3S200AN-4FT256I.E15 1504.23,1506.01 1485.37,1487.15 1485.37,1466.85 1495.25,1456.97 1495.25,1439.01 1485.37,1429.13 1485.37,1411.17 1504.23,1392.31 XC3S200AN-4FT256I.H12 ; v1(1613.23,1279.87) 1616.67,1279.87 1690.12,1206.42 1690.12,1190.12 1679.75,1179.75 ; C36.2@1614.35,923.92 C36.2 1597.5,945.34 1597.5,947.5 ; 100nF.2@1696.08,1508.92 1673.39,1486.23 1673.39,1450.12 1644.59,1421.32 XC3S200AN-4FT256I.J15 1587.74,1421.32 1532.07,1365.64 ; 100nF.2@1786.08,1091.08 1775,1080 1763.2,1080 ; 100nF.2@1811.08,1393.92 1784.22,1393.92 1726.94,1336.64 XC3S200AN-4FT256I.N15 1700.27,1309.97 1653.57,1356.66 1635.61,1356.66 1587.74,1308.8 ; 1818.31,893.5 1818,893.2 1818,857 1830,845 1890.86,845 ; 1818.31,956.5 1820,958.19 1820,1023.2 1763.2,1080 ; 100nF.1@1885,905.32 1885,850.86 1890.86,845 ; ME6209A33.2@2207.4,804.76 2207.4,837.6 2200,845 1890.86,845 ; XC3S200AN-4FT256I.E11 1420.71,1421.32 1476.39,1365.64 XC3S200AN-4FT256I.H12 ; XC3S200AN-4FT256I.N4 XC3S200AN-4FT256I.P5 XC3S200AN-4FT256I.R4 ; XC3S200AN-4FT256I.R4 1503.06,948.06 1541.12,910 1560,910 1597.5,947.5 ; XC3S200AN-4FT256I.H12 1532.07,1365.64 ; 1532.07,1365.64 1587.74,1309.97 1587.74,1308.8 ; 1679.75,1179.75 1688.03,1179.75 1697.01,1170.77 XC3S200AN-4FT256I.R12 1699.1,1144.1 1763.2,1080
  Top Layer w12: 886.05,596.45 792.5,690 792.5,899.66 100nF.2@1018.92,1126.08 ; 100nF.2@1128.92,1016.08 1128.92,964.99 W25Q32JVSSIQ.8 W25Q32JVSSIQ.7 1129.24,894.59 1136.83,894.59 1141.73,889.69 1228.97,889.69 1240.36,901.08 100nF.2@1246.08,901.08 ; v1(1335.02,1115) 1336.11,1116.08 XC3S200AN-4FT256I.J5@1336.11,1141.85 ; 1405.16,648.72 1405.16,710.15 1531.08,836.08 1531.08,836.88 XC3S200AN-4FT256I.T3@1476.39,891.58 ; 1818.31,893.5 1818.31,956.5
  Top Layer w20: 100nF.2@1696.08,1508.92 1755,1567.84 1755,1865 1930,2040 2045,2040 2073,2068 CS.1 ; CH340G.4 1990,640 2010,660 2180,660 ; CH340G.16 2180.83,355.83 3V3.1 2297.5,515 2265,547.5 2265,575 2180,660 ; ME6209A33.2@2207.4,804.76 2207.4,735 2207.4,687.4 2180,660
  Bottom Layer w10: 100nF.2@1223.92,1196.08 1284.99,1135 1315.02,1135 v1(1335.02,1115) ; 100nF.2@1308.92,1396.08 1341.92,1396.08 v1(1364.99,1419.15) 1366.08,1420.24 100nF.2@1366.08,1451.08 ; 1547.16,1125 1558.29,1113.88 v1(1558.29,1112.87) ; v1(1613.23,1279.87) 1613.23,1283.56 1616.08,1286.41 100nF.2@1616.08,1308.92
  Bottom Layer w12: v1(1335.02,1115) 1336.1,1113.92 1467.8,1113.92 1470.64,1111.08 1476.08,1111.08 1492.16,1095 1517.16,1095 1547.16,1125 100nF.2@1561.08,1138.92 ; 100nF.2@1558.92,1366.08 100nF.2@1616.08,1308.92
5V: 5V.1 22uF.2@1917.4,1555 100k.1 C5.2 J1.1 JW5033S.3 ME6209A33.3 P1.5 | length 1737.5
  Top Layer w12: 2225,1371 2244,1352 2267,1352 2280,1339 2280,1185 2271.06,1176.06 J1.1
  Top Layer w20: JW5033S.3@1826.81,1637.6 1825,1635.79 1825,1616.72 1836.72,1605 1868.28,1605 1880,1593.28 1880,1566.72 1891.72,1555 1917.4,1555 1995,1555 ; 100k.1 2025,1585 1995,1555 ; 2225,1371 2200.72,1371 2115,1456.72 2115,1540 2100,1555 1995,1555 ; J1.1 2173.06,1176.06 2137.4,1140.4 2137.4,985 2137.4,926.72 2149.12,915 2205,915 2265,855 2265,645 2295,615 5V.1
"B1 FPGA": "FPGA 1.1" XC3S200AN-4FT256I.A14
"B2 FPGA": "FPGA 2.1" XC3S200AN-4FT256I.A13
"B3 FPGA": "FPGA 3.1" XC3S200AN-4FT256I.A12
"B4 FPGA": "FPGA 4.1" XC3S200AN-4FT256I.A11
"B5 FPGA": "FPGA 5.1" XC3S200AN-4FT256I.A10
"B6 FPGA": "FPGA 6.1" XC3S200AN-4FT256I.A9
"B7 FPGA": "FPGA 7.1" XC3S200AN-4FT256I.A8
"B8 FPGA": "FPGA 8.1" XC3S200AN-4FT256I.A7
C2CK: EFM8BB1x.5 P1.1
C2D: EFM8BB1x.6 P1.2
"CH340G RXD": CH340G.3 EFM8BB1x.18
"CH340G TXD": CH340G.2 EFM8BB1x.17
"DISP CS": CS.3 XC3S200AN-4FT256I.H16 | length 804.6
  Top Layer w8: XC3S200AN-4FT256I.H16 1732.5,1593.92 1732.5,1869.37 1873,2009.87 CS.3
"DISP DC/RS": CS.5 XC3S200AN-4FT256I.F16 | length 711
  Top Layer w8: XC3S200AN-4FT256I.F16 1597.2,1532.68 1669.3,1604.78 1669.3,2171.3 CS.5
"DISP MISO": CS.9 XC3S200AN-4FT256I.C16 | length 664.7
  Top Layer w10: XC3S200AN-4FT256I.C16 1502.5,1642.31 1502.5,1653.81 1487.5,1668.81 v1(1487.5,1672.5)
  Bottom Layer w10: CS.9 1273,2122 1445,1950 1445,1715 v1(1487.5,1672.5)
"DISP MOSI": CS.6 XC3S200AN-4FT256I.E16 | length 631.4
  Top Layer w8: XC3S200AN-4FT256I.E16 1555,1583.45 1555,1632.5 1570,1647.5 1570,2172 CS.6
"DISP RESET": CS.4 XC3S200AN-4FT256I.G16 | length 748.6
  Top Layer w8: XC3S200AN-4FT256I.G16 1682.3,1599.4 1682.3,1872.3 1775,1965 1775,2173 CS.4
"DISP SCK": CS.7 XC3S200AN-4FT256I.D16 | length 613.1
  Top Layer w8: CS.7 1472.5,2174.5 1472.5,1737.5 1520,1690 1520,1604.13 XC3S200AN-4FT256I.D16
"FPGA DONE": Done.1 EFM8BB1x.14 XC3S200AN-4FT256I.T15 | length 1399.7
  Top Layer w6: Done.1 1380,335 1424.84,379.84 1424.84,445.16 ; EFM8BB1x.14 1424.84,445.16 ; v1(1557.5,455) 1537.5,435 1435,435 1424.84,445.16 ; v1(1687.5,1010) 1687.5,1037.5 v1(1725,1075) ; XC3S200AN-4FT256I.T15 1810.45,1223.54 1821.63,1212.37 1821.63,1198.37 v1(1825,1195)
  Bottom Layer w6: v1(1557.5,455) 1557.5,812.5 1687.5,942.5 v1(1687.5,1010) ; v1(1725,1075) 1825,1175 v1(1825,1195)
"FPGA PROG B": "Prog B.1" EFM8BB1x.11 XC3S200AN-4FT256I.A2 | length 1288.4
  Top Layer w6: 1070,335 1115,335 1120,340 v1(1120,355)
  Top Layer w8: v1(1030,1252.5) 1030.48,1252.98 1030.48,1281.64 XC3S200AN-4FT256I.A2 ; v1(1147.5,762.5) 1170,740 v1(1170,682.5) ; v1(1202.5,512.5) 1202.5,492.5 1214.21,480.79 EFM8BB1x.11
  Bottom Layer w6: v1(1120,355) 1120,395 1202.5,477.5 v1(1202.5,512.5)
  Bottom Layer w8: v1(1030,1252.5) 1030,880 v1(1147.5,762.5) ; v1(1170,682.5) 1170,680 1202.5,647.5 v1(1202.5,512.5)
GND: 15k.1 22uF.1 100nF.1@991.08,1153.92 100nF.1@1068.92,1433.92 100nF.1@1101.08,1043.92 100nF.1@1196.08,1223.92 100nF.1@1198.92,1563.92 100nF.1@1216.08,928.92 100nF.1@1281.08,1423.92 100nF.1@1308.92,1673.92 100nF.1@1393.92,1086.08 100nF.1@1393.92,1478.92 100nF.1@1503.92,1138.92 100nF.1@1531.08,1393.92 100nF.1@1558.92,863.92 100nF.1@1588.92,1111.08 100nF.1@1618.92,1586.08 100nF.1@1643.92,1281.08 100nF.1@1723.92,1481.08 100nF.1@1813.92,1118.92 100nF.1@1838.92,1366.08 100nF.2@1281.08,1308.92 100nF.2@1336.08,1201.08 100nF.2@1336.08,1311.08 100nF.2@1366.08,1171.08 100nF.2@1451.08,1308.92 100nF.2@1503.92,1198.92 100nF.2@1885,944.69 "TCXO 12MHz.2" C4.1 C5.1 C6.1 C7.2 C8.2 C9.2 C12.2 C36.1 CH340G.1 CS.2 D1.1 D2.1 D3.1 D4.1 D5.1 D6.1 D7.1 D8.1 D9.1 EFM8BB1x.3 EFM8BB1x.12 EFM8BB1x.21 GND.1 J1.5 J1.Shell JW5033S.1 ME6209A33.1 P1.4 P1.6 P2.2 W25Q32JVSSIQ.4 XC3S200AN-4FT256I.A1 XC3S200AN-4FT256I.A16 XC3S200AN-4FT256I.B7 XC3S200AN-4FT256I.B11 XC3S200AN-4FT256I.C3 XC3S200AN-4FT256I.C14 XC3S200AN-4FT256I.E5 XC3S200AN-4FT256I.E12 XC3S200AN-4FT256I.F2 XC3S200AN-4FT256I.F6 XC3S200AN-4FT256I.G8 XC3S200AN-4FT256I.G10 XC3S200AN-4FT256I.G15 XC3S200AN-4FT256I.H9 XC3S200AN-4FT256I.J8 XC3S200AN-4FT256I.K2 XC3S200AN-4FT256I.K7 XC3S200AN-4FT256I.K9 XC3S200AN-4FT256I.L11 XC3S200AN-4FT256I.L15 XC3S200AN-4FT256I.M5 XC3S200AN-4FT256I.M12 XC3S200AN-4FT256I.N6 XC3S200AN-4FT256I.P3 XC3S200AN-4FT256I.P14 XC3S200AN-4FT256I.R2 XC3S200AN-4FT256I.R6 XC3S200AN-4FT256I.R10 XC3S200AN-4FT256I.R16 XC3S200AN-4FT256I.T1 XC3S200AN-4FT256I.T16 Y1.2 Y1.4 | length 1813.9
  Top Layer w10: v1(982.5,1275) 982.5,1274.92 XC3S200AN-4FT256I.A1 ; v1(1087.5,1255) 1087.86,1254.64 1114.13,1254.64 XC3S200AN-4FT256I.C3 ; v1(1154.92,1577.8) 1157.52,1575.19 1180.8,1575.19 1192.07,1563.92 100nF.1@1198.92,1563.92 ; XC3S200AN-4FT256I.F2 1170.16,1170.38 v1(1170.48,1170.7) ; XC3S200AN-4FT256I.B7 1198.49,1392.99 1224.51,1392.99 v1(1225,1392.5) ; v1(1225,1280) 1225.84,1279.16 XC3S200AN-4FT256I.E5 ; XC3S200AN-4FT256I.K2 1282.61,1032.67 1308.94,1032.67 v1(1310.03,1033.76) ; v1(1307.5,1477.5) 1308.43,1478.43 1308.43,1503.91 XC3S200AN-4FT256I.B11 ; XC3S200AN-4FT256I.G8 v1(1365,1305) ; EFM8BB1x.12 1385.59,472.83 1385.59,500.59 1399.73,514.73 v1(1399.73,515.13) ; v1(1395,1060) 1395.29,1059.71 1420.42,1059.71 XC3S200AN-4FT256I.M5 ; v1(1400.11,1228.47) 1401.12,1227.46 1419.7,1227.46 XC3S200AN-4FT256I.J8 ; EFM8BB1x.21 1424.84,539.84 EFM8BB1x.3 ; XC3S200AN-4FT256I.R2 1421.78,893.46 1421.78,921.78 v1(1422.85,922.85) ; XC3S200AN-4FT256I.H9 XC3S200AN-4FT256I.G10 1421.81,1338.9 1448.9,1338.9 v1(1450,1340) ; XC3S200AN-4FT256I.E12 1421.13,1449.58 1449.58,1449.58 v1(1450,1450) ; XC3S200AN-4FT256I.C14 1420.97,1560.26 1449.74,1560.26 v1(1450,1560) ; XC3S200AN-4FT256I.N6 1476.68,1059.71 1504.71,1059.71 v1(1505,1060) ; XC3S200AN-4FT256I.K9 1476.91,1226.97 1504.56,1226.97 v1(1505.08,1227.49) 1505.71,1227.49 1532.51,1254.29 XC3S200AN-4FT256I.L11 1559.95,1254.34 v1(1560,1282.5) v1(1560,1282.5) ; XC3S200AN-4FT256I.R6 1533.2,1004.87 1533.2,1032.71 v1(1534.34,1033.85) ; XC3S200AN-4FT256I.G15 1559.95,1476.95 v1(1560,1447.5) v1(1560,1447.5) ; v1(1615,1227.5) 1615.29,1227.79 1615.29,1254 XC3S200AN-4FT256I.M12 ; XC3S200AN-4FT256I.R10 1643.47,1115.04 v1(1673.43,1114.99) v1(1673.43,1114.99) ; v1(1670,1395) 1670.63,1394.37 1670.63,1366.27 XC3S200AN-4FT256I.L15 ; XC3S200AN-4FT256I.P14 1727.22,1254.01 1727.22,1227.78 v1(1727.5,1227.5) ; XC3S200AN-4FT256I.R16 1811.29,1282.13 1829.16,1300 v1(1830,1300) ; JW5033S.1 1877.4,1712.4 v1(1877.5,1712.5) ; XC3S200AN-4FT256I.T16 1838.79,1254.29 1859.5,1275 v1(1860,1275) ; v1(2030,1510) 22uF.1@2077.6,1510 ; 15k.1 2100,1607.5 v1(2115,1592.5)
  Top Layer w12: XC3S200AN-4FT256I.P3 1421.78,946.99 1421.78,923.93 v1(1422.85,922.85)
  Top Layer w20: J1.Shell@2337,1180 J1.Shell@2337,1274.49
  Bottom Layer w10: v1(1087.5,1255) 1087.5,1254.34 1170.48,1171.36 v1(1170.48,1170.7) ; v1(1310.03,1033.76) 1368.76,1033.76 1370,1035 ; 100nF.2@1366.08,1171.08 1398.24,1138.92 100nF.1@1503.92,1138.92 ; 100nF.1@1393.92,1086.08 1393.92,1061.08 v1(1395,1060) ; 100nF.2@1503.92,1198.92 1503.92,1226.34 v1(1505.08,1227.49)
  Bottom Layer w12: v1(1395,1060) 1370,1035 1370,975.71 v1(1422.85,922.85)
"IND uC": EFM8BB1x.13 uC.1
NetC3_1: 3.3uH.1 C3.1 JW5033S.2 | length 613.6
  Top Layer w12: JW5033S.2 1795,1675 1776,1694 1776,1776 1795,1795 1842.6,1795 1870,1795 1880,1805 1880,1935 1896.57,1951.57 3.3uH.1
NetC3_2: C3.2 JW5033S.6
NetC7_1: C7.1 CH340G.7 Y1.3
NetC8_1: C8.1 CH340G.8 Y1.1
NetD1_2: D1.2 uC.2 | length 59.1
  Top Layer w12: D1.2 uC.2
NetD2_2: "FPGA 1.2" D2.2 | length 59.1
  Top Layer w12: D2.2 620.55,1540
NetD3_2: "FPGA 2.2" D3.2 | length 59.1
  Top Layer w12: D3.2 620.55,1465
NetD4_2: "FPGA 3.2" D4.2 | length 59.1
  Top Layer w12: D4.2 620.55,1390
NetD5_2: "FPGA 4.2" D5.2 | length 59.1
  Top Layer w12: D5.2 620.55,1315
NetD6_2: "FPGA 5.2" D6.2 | length 59.1
  Top Layer w12: D6.2 620.55,1240
NetD7_2: "FPGA 6.2" D7.2 | length 59.1
  Top Layer w12: D7.2 620.55,1165
NetD8_2: "FPGA 7.2" D8.2 | length 59.1
  Top Layer w12: D8.2 620.55,1090
NetD9_2: "FPGA 8.2" D9.2 | length 59.1
  Top Layer w12: D9.2 620.55,1015
NetR1_2: 100k.2 JW5033S.5 | length 112
  Top Layer w12: JW5033S.5 1965,1675 1975,1685 1975,1695 1985,1705 2020.55,1705 100k.2
NetR2_2: 7.5k.1 15k.2 JW5033S.4 | length 335.5
  Top Layer w12: JW5033S.4 1935.75,1635 1965,1635 1975,1645 1975,1660 1990,1675 2090,1675 ; 15k.2 2100,1685 2090,1675 ; 7.5k.1 2175,1685 2165,1675 2090,1675
"SPI CLK FLASH": EFM8BB1x.2 W25Q32JVSSIQ.6 XC3S200AN-4FT256I.P1 | length 595.7
  Top Layer w6: W25Q32JVSSIQ.6 1155.29,846.15 1179.14,870 1300,870 1322.38,892.38 XC3S200AN-4FT256I.P1 1366.16,893.51 1393.9,893.51 v1(1395.03,894.64) ; EFM8BB1x.2 1444.76,587.52 1444.76,645.54 1440.19,650.11 1440.19,695.42 1445,700.23 v1(1445,705)
  Bottom Layer w6: v1(1395.03,894.64) 1395,890 1445,840 v1(1445,705)
"SPI CS FLASH": EFM8BB1x.19 W25Q32JVSSIQ.1 XC3S200AN-4FT256I.N1 | length 1201.5
  Top Layer w6: W25Q32JVSSIQ.1 913.93,750 1090,750 1195,855 1325,855 v1(1335,865) ; v1(1300,910) 1315,925 1329.25,925 1334.02,920.22 XC3S200AN-4FT256I.N1 ; v1(1420,810) 1450,840 1475,840 v1(1485,830) ; EFM8BB1x.19 1472.36,539.92 1506.4,539.92 1521.48,555 v1(1525,555)
  Bottom Layer w6: v1(1300,910) 1300,900 v1(1335,865) 1335,869.77 1345.23,880 1355,880 1395,840 1395,820 1401.63,813.37 1416.63,813.37 v1(1420,810) ; v1(1485,830) 1545,770 1545,573.44 1526.56,555 v1(1525,555)
"SPI MISO FLASH": EFM8BB1x.1 W25Q32JVSSIQ.2 XC3S200AN-4FT256I.M1 | length 1289.6
  Top Layer w6: W25Q32JVSSIQ.2 921.17,683.85 967.32,730 v1(970,730) ; XC3S200AN-4FT256I.M1 1336.94,948.06 v1(1365,920) ; v1(1462.6,670.42) 1460,667.82 1460,660.23 1465,655.23 1465,655 1470,650 1470,610 1464.21,604.21 EFM8BB1x.1
  Bottom Layer w6: v1(970,730) 1315,730 1465,580 1510,580 1520,590 1520,630 1508.8,641.2 1473.8,641.2 1465.08,649.92 1465.08,666.15 v1@1460.81,670.42 ; v1(1365,920) 1397.69,920 1465,852.69 1465,672.82 v1(1462.6,670.42)
"SPI MOSI FLASH": EFM8BB1x.20 W25Q32JVSSIQ.5 XC3S200AN-4FT256I.R1 | length 609.8
  Top Layer w6: W25Q32JVSSIQ.5 1190.79,810.79 1215,835 1363.33,835 XC3S200AN-4FT256I.R1 1392.87,808.51 v1(1420,781.38) ; EFM8BB1x.20 1472.76,560 1490,560 1495,565 v1(1495,610)
  Bottom Layer w6: v1(1420,781.38) 1420,660 1470,610 v1(1495,610)
SYSCLK: "TCXO 12MHz.3" CLK.1 XC3S200AN-4FT256I.R9 | length 1246.1
  Top Layer w10: XC3S200AN-4FT256I.R9 1615.58,1058.25 1665,1008.83 1665,915 1686.5,893.5 1731.69,893.5 1731.69,833.31 v1(1785,780) ; v1(2265.21,389.79) 2267.23,391.81 2289.14,391.81 2295,397.67 2295,409.14 2300.86,415 CLK.1
  Bottom Layer w10: v1(1785,780) 2030,780 2200,610 2200,425 2235,390 2265,390 v1(2265.21,389.79)
TCK: P2.5 XC3S200AN-4FT256I.A15
TDI: P2.3 XC3S200AN-4FT256I.B1
TDO: P2.6 XC3S200AN-4FT256I.B16
TMS: P2.4 XC3S200AN-4FT256I.B2
"USB D+": CH340G.5 J1.3 | length 919.9
  Top Layer w12: CH340G.5 1940,606.81 1968.32,635.13 1968.32,763.32 v1(2017.5,812.5) ; v1(1985,1150) 1985,1032.5 v1(2015,1002.5) ; v1(2010,1226) 2010.62,1226.62 2231.06,1226.62 J1.3
  Bottom Layer w12: v1(1985,1150) 1985,1201 v1(2010,1226) ; v1(2015,1002.5) 2015,818.14 2017.5,815.64 v1(2017.5,812.5)
"USB D-": CH340G.6 J1.2 | length 940.3
  Top Layer w12: CH340G.6 1890,606.81 1951.32,668.13 1951.32,771.32 1979.67,799.67 1979.67,817.17 v1(1980,817.5) ; v1(1980,1002.5) 1945,1037.5 1945,1175 1971.65,1201.65 J1.2
  Bottom Layer w12: v1(1980,817.5) v1(1980,1002.5)
pads on no net: CH340G.9 CH340G.10 CH340G.11 CH340G.12 CH340G.13 CH340G.14 CH340G.15 CS.10 CS.11 CS.12 CS.13 CS.14 EFM8BB1x.7 EFM8BB1x.8 EFM8BB1x.9 EFM8BB1x.10 EFM8BB1x.15 EFM8BB1x.16 J1.4 J1.MH1 J1.MH2 XC3S200AN-4FT256I.A3 XC3S200AN-4FT256I.A4 XC3S200AN-4FT256I.A5 XC3S200AN-4FT256I.A6 XC3S200AN-4FT256I.B3 XC3S200AN-4FT256I.B4 XC3S200AN-4FT256I.B6 XC3S200AN-4FT256I.B8 XC3S200AN-4FT256I.B10 XC3S200AN-4FT256I.B12 XC3S200AN-4FT256I.B14 XC3S200AN-4FT256I.B15 XC3S200AN-4FT256I.C1 XC3S200AN-4FT256I.C2 XC3S200AN-4FT256I.C4 XC3S200AN-4FT256I.C5 XC3S200AN-4FT256I.C6 XC3S200AN-4FT256I.C7 XC3S200AN-4FT256I.C8 XC3S200AN-4FT256I.C9 XC3S200AN-4FT256I.C10 XC3S200AN-4FT256I.C11 XC3S200AN-4FT256I.C12 XC3S200AN-4FT256I.C13 XC3S200AN-4FT256I.C15 XC3S200AN-4FT256I.D1 XC3S200AN-4FT256I.D3 XC3S200AN-4FT256I.D4 XC3S200AN-4FT256I.D5 XC3S200AN-4FT256I.D6 XC3S200AN-4FT256I.D7 XC3S200AN-4FT256I.D8 XC3S200AN-4FT256I.D9 XC3S200AN-4FT256I.D10 XC3S200AN-4FT256I.D11 XC3S200AN-4FT256I.D12 XC3S200AN-4FT256I.D13 XC3S200AN-4FT256I.D14 XC3S200AN-4FT256I.D15 XC3S200AN-4FT256I.E1 XC3S200AN-4FT256I.E2 XC3S200AN-4FT256I.E3 XC3S200AN-4FT256I.E4 XC3S200AN-4FT256I.E6 XC3S200AN-4FT256I.E7 XC3S200AN-4FT256I.E9 XC3S200AN-4FT256I.E10 XC3S200AN-4FT256I.E13 XC3S200AN-4FT256I.E14 XC3S200AN-4FT256I.F1 XC3S200AN-4FT256I.F3 XC3S200AN-4FT256I.F4 XC3S200AN-4FT256I.F7 XC3S200AN-4FT256I.F8 XC3S200AN-4FT256I.F9 XC3S200AN-4FT256I.F10 XC3S200AN-4FT256I.F11 XC3S200AN-4FT256I.F12 XC3S200AN-4FT256I.F13 XC3S200AN-4FT256I.F14 XC3S200AN-4FT256I.F15 XC3S200AN-4FT256I.G1 XC3S200AN-4FT256I.G2 XC3S200AN-4FT256I.G3 XC3S200AN-4FT256I.G4 XC3S200AN-4FT256I.G5 XC3S200AN-4FT256I.G6 XC3S200AN-4FT256I.G11 XC3S200AN-4FT256I.G12 XC3S200AN-4FT256I.G13 XC3S200AN-4FT256I.G14 XC3S200AN-4FT256I.H1 XC3S200AN-4FT256I.H3 XC3S200AN-4FT256I.H4 XC3S200AN-4FT256I.H5 XC3S200AN-4FT256I.H6 XC3S200AN-4FT256I.H7 XC3S200AN-4FT256I.H10 XC3S200AN-4FT256I.H11 XC3S200AN-4FT256I.H13 XC3S200AN-4FT256I.H14 XC3S200AN-4FT256I.H15 XC3S200AN-4FT256I.J1 XC3S200AN-4FT256I.J2 XC3S200AN-4FT256I.J3 XC3S200AN-4FT256I.J4 XC3S200AN-4FT256I.J6 XC3S200AN-4FT256I.J7 XC3S200AN-4FT256I.J10 XC3S200AN-4FT256I.J11 XC3S200AN-4FT256I.J12 XC3S200AN-4FT256I.J13 XC3S200AN-4FT256I.J14 XC3S200AN-4FT256I.J16 XC3S200AN-4FT256I.K1 XC3S200AN-4FT256I.K3 XC3S200AN-4FT256I.K4 XC3S200AN-4FT256I.K5 XC3S200AN-4FT256I.K6 XC3S200AN-4FT256I.K11 XC3S200AN-4FT256I.K12 XC3S200AN-4FT256I.K13 XC3S200AN-4FT256I.K14 XC3S200AN-4FT256I.K15 XC3S200AN-4FT256I.K16 XC3S200AN-4FT256I.L1 XC3S200AN-4FT256I.L2 XC3S200AN-4FT256I.L3 XC3S200AN-4FT256I.L4 XC3S200AN-4FT256I.L5 XC3S200AN-4FT256I.L6 XC3S200AN-4FT256I.L7 XC3S200AN-4FT256I.L8 XC3S200AN-4FT256I.L9 XC3S200AN-4FT256I.L10 XC3S200AN-4FT256I.L13 XC3S200AN-4FT256I.L14 XC3S200AN-4FT256I.L16 XC3S200AN-4FT256I.M3 XC3S200AN-4FT256I.M4 XC3S200AN-4FT256I.M7 XC3S200AN-4FT256I.M8 XC3S200AN-4FT256I.M10 XC3S200AN-4FT256I.M11 XC3S200AN-4FT256I.M13 XC3S200AN-4FT256I.M14 XC3S200AN-4FT256I.M15 XC3S200AN-4FT256I.M16 XC3S200AN-4FT256I.N2 XC3S200AN-4FT256I.N3 XC3S200AN-4FT256I.N5 XC3S200AN-4FT256I.N7 XC3S200AN-4FT256I.N8 XC3S200AN-4FT256I.N9 XC3S200AN-4FT256I.N10 XC3S200AN-4FT256I.N11 XC3S200AN-4FT256I.N12 XC3S200AN-4FT256I.N13 XC3S200AN-4FT256I.N14 XC3S200AN-4FT256I.N16 XC3S200AN-4FT256I.P2 XC3S200AN-4FT256I.P6 XC3S200AN-4FT256I.P7 XC3S200AN-4FT256I.P8 XC3S200AN-4FT256I.P9 XC3S200AN-4FT256I.P10 XC3S200AN-4FT256I.P11 XC3S200AN-4FT256I.P12 XC3S200AN-4FT256I.P13 XC3S200AN-4FT256I.P15 XC3S200AN-4FT256I.P16 XC3S200AN-4FT256I.R3 XC3S200AN-4FT256I.R5 XC3S200AN-4FT256I.R7 XC3S200AN-4FT256I.R11 XC3S200AN-4FT256I.R13 XC3S200AN-4FT256I.R14 XC3S200AN-4FT256I.R15 XC3S200AN-4FT256I.T2 XC3S200AN-4FT256I.T4 XC3S200AN-4FT256I.T5 XC3S200AN-4FT256I.T6 XC3S200AN-4FT256I.T7 XC3S200AN-4FT256I.T8 XC3S200AN-4FT256I.T9 XC3S200AN-4FT256I.T10 XC3S200AN-4FT256I.T11 XC3S200AN-4FT256I.T12 XC3S200AN-4FT256I.T13 XC3S200AN-4FT256I.T14

## Polygon pours and split planes (outlines as drawn)
GND on Top Layer "NONET_L02_P-001" (solid, remove dead copper, shelved, pour order 1): 2293.58,2230 cw(c2293.58,2130) 2364.29,2200.71 2375,2190 cw(c2326.72,2141.72) 2395,2141.72 2395,376.42 cw(c2295,376.42) 2365.71,305.71 2360,300 cw(c2311.72,348.28) 2311.72,280 546.42,280 cw(c546.42,380) 475.71,309.29 465,320 cw(c513.28,368.28) 445,368.28 445,2128.58 cw(c545,2128.58) 474.29,2199.29 475.71,2200.71 cw(c546.42,2130) 546.42,2230
GND on Bottom Layer "NONET_L02_P-001" (solid, remove dead copper, shelved, pour order 0): 2293.58,2230 cw(c2293.58,2130) 2364.29,2200.71 2375,2190 cw(c2326.72,2141.72) 2395,2141.72 2395,376.42 cw(c2295,376.42) 2365.71,305.71 2365,305 cw(c2304.64,365.36) 2304.64,280 546.42,280 cw(c546.42,380) 475.71,309.29 474.29,310.71 cw(c545,381.42) 445,381.42 445,2130 cw(c541.57,2130) 473.28,2198.28 480,2205 cw(c540.36,2144.64) 540.36,2230

## Keep-outs
Keep-Out Layer:
  lines w10: 1690,2230 2285,2230 cw(c2285,2109.29) 2370.36,2194.64 cw(c2310.86,2135.15) 2395,2135.15 2395,1565 2395,405 2395,370.36 cw(c2309.64,370.36) 2370,310 cw(c2297.57,382.43) 2297.57,280 1435,280 554.5,280 cw(c554.5,399.5) 470,315 cw(c530.36,375.36) 445,375.36 445,1400 445,2120.5 cw(c564.5,2120.5) 480,2205 cw(c540.36,2144.64) 540.36,2230 1700,2230 ; 2390,2165 2145,2165 2145,2050 2395,2050

## Other copper
Top Layer:
  text "L1" at 2165,2115 h30
Bottom Layer:
  text "L2" at 2375,2070 h30

## Silkscreen, mask and mechanical layers (free items; w line width, h text height)
Top Overlay:
  lines w4: 966.25,1153.75 992.5,1180 1045,1127.5 1018.75,1101.25 966.25,1153.75 ; 1015,1407.5 1042.5,1380 1095,1432.5 1067.5,1460 1015,1407.5 ; 1076.25,1043.75 1102.5,1070 1155,1017.5 1128.75,991.25 1076.25,1043.75 ; 1145,1537.5 1172.5,1510 1225,1562.5 1197.5,1590 1145,1537.5 ; 1190,927.5 1217.5,955 1270,902.5 1242.5,875 1190,927.5 ; 1255,1647.5 1282.5,1620 1335,1672.5 1307.5,1700 1255,1647.5 ; 1506.25,836.25 1532.5,810 1585,862.5 1558.75,888.75 1506.25,836.25 ; 1565,1612.5 1592.5,1640 1645,1587.5 1617.5,1560 1565,1612.5 ; 1566.25,896.25 1592.5,870 1645,922.5 1618.75,948.75 1566.25,896.25 ; 1670,1507.5 1697.5,1535 1750,1482.5 1722.5,1455 1670,1507.5 ; 1760,1090 1785,1065 1838.75,1118.75 1813.75,1143.75 1760,1090 ; 1785,1392.5 1812.5,1420 1865,1367.5 1837.5,1340 1785,1392.5 ; 1867.5,887.5 1902.5,887.5 1902.5,962.5 1867.5,962.5 1867.5,887.5
  text "MISO" at 1255,2100 h50 r270
  text "3V3" at 1355,2100 h50 r270
  text "SCK" at 1455,2100 h50 r270
  text "MOSI" at 1555,2100 h50 r270
  text "DC/RS" at 1655,2100 h50 r270
  text "RST" at 1750,2100 h50 r270
  text "TMS" at 650,2025 h50 r90
  text "TDO" at 752.5,2025 h50 r90
  text "GND" at 880,1705 h50
  text "TDI" at 652.5,1607.5 h50 r90
  text "TCK" at 750,1585 h50 r90
  text "QFN20" at 1329.29,415 h50 r90
Bottom Overlay:
  lines w4: 1171,1224 1196,1249 1248.5,1196.5 1223.5,1171.5 1171,1224 ; 1255,1425 1307.5,1372.5 1332.5,1397.5 1280,1450 1255,1425 ; 1256,1309 1308.5,1256.5 1333.5,1281.5 1281,1334 1256,1309 ; 1311,1201 1336,1176 1388.5,1228.5 1363.5,1253.5 1311,1201 ; 1311.5,1311.5 1364,1364 1389,1339 1336.5,1286.5 1311.5,1311.5 ; 1341,1114 1366,1139 1418.5,1086.5 1393.5,1061.5 1341,1114 ; 1341,1171 1366,1146 1418.5,1198.5 1393.5,1223.5 1341,1171 ; 1342,1452 1367,1427 1419.5,1479.5 1394.5,1504.5 1342,1452 ; 1425.5,1309.5 1478,1257 1503,1282 1450.5,1334.5 1425.5,1309.5 ; 1451.5,1111.5 1476.5,1086.5 1529,1139 1504,1164 1451.5,1111.5 ; 1451.5,1171.5 1476.5,1146.5 1529,1199 1504,1224 1451.5,1171.5 ; 1505.5,1394.5 1558,1342 1583,1367 1530.5,1419.5 1505.5,1394.5 ; 1536,1139 1561,1164 1613.5,1111.5 1588.5,1086.5 1536,1139 ; 1591.5,1308.5 1644,1256 1669,1281 1616.5,1333.5 1591.5,1308.5

## Text inside footprints (layer, text, board x,y; h text height)
CS: Top Overlay "3V3" at 2055,2100 h50 r270; Top Overlay "GND" at 1960,2100 h50 r270
D1: Top Overlay "+" at 612.68,928.19 h30 r90
D2: Top Overlay "+" at 612.68,1528.19 h30 r90
D3: Top Overlay "+" at 612.68,1453.19 h30 r90
D4: Top Overlay "+" at 612.68,1378.19 h30 r90
D5: Top Overlay "+" at 612.68,1303.19 h30 r90
D6: Top Overlay "+" at 612.68,1228.19 h30 r90
D7: Top Overlay "+" at 612.68,1153.19 h30 r90
D8: Top Overlay "+" at 612.68,1078.19 h30 r90
D9: Top Overlay "+" at 612.68,1003.19 h30 r90
J1: Mechanical 2 "PCB Edge" at 2419.68,1180 h16 r90
P1: Top Overlay "6" at 498.39,506.89 h40 r180; Top Overlay "5" at 498.39,782.48 h40 r180; Top Overlay "2" at 795.24,506.89 h40 r180; Top Overlay "1" at 783.43,782.48 h40 r180
P2: Top Overlay "6" at 771.61,1968.11 h40; Top Overlay "5" at 771.61,1692.52 h40; Top Overlay "2" at 474.76,1968.11 h40; Top Overlay "1" at 486.57,1692.52 h40